# Altium PCB LCD_PCC.PcbDoc
Units mil, origin at the board's own origin, x right, y up, seen from the top; angles counter-clockwise.
Board outline 10841.54 x 4658.74 mil, 2 copper layers (Top Layer, Bottom Layer); 82 components, 79 nets, 292 pads, 8 vias.
Unrouted connection lines stored in the file: 34.
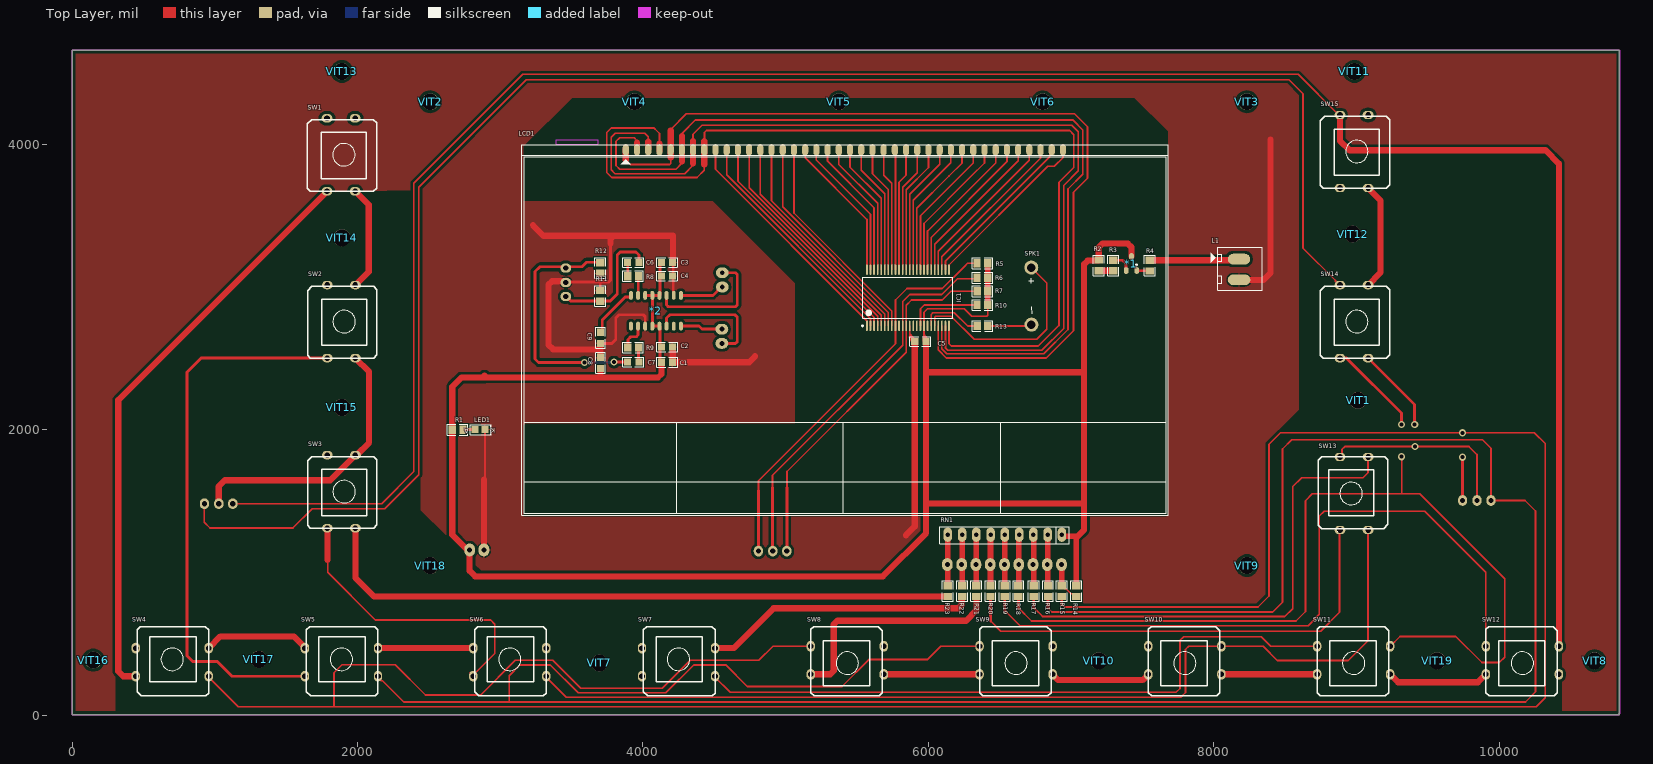
[diagram p0: Top Layer view]
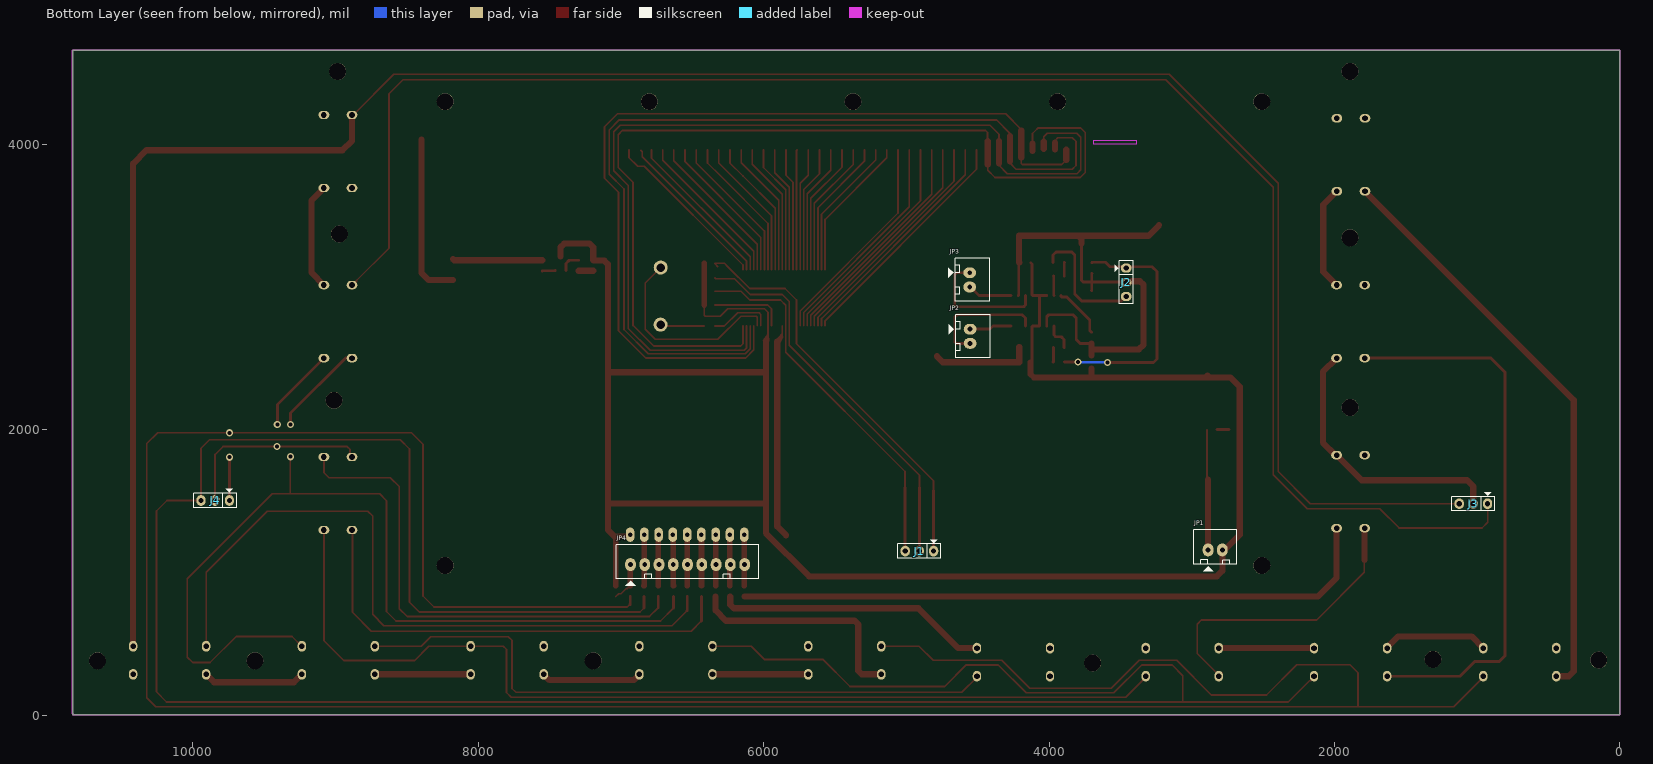
[diagram p1: Bottom Layer view, seen from below]
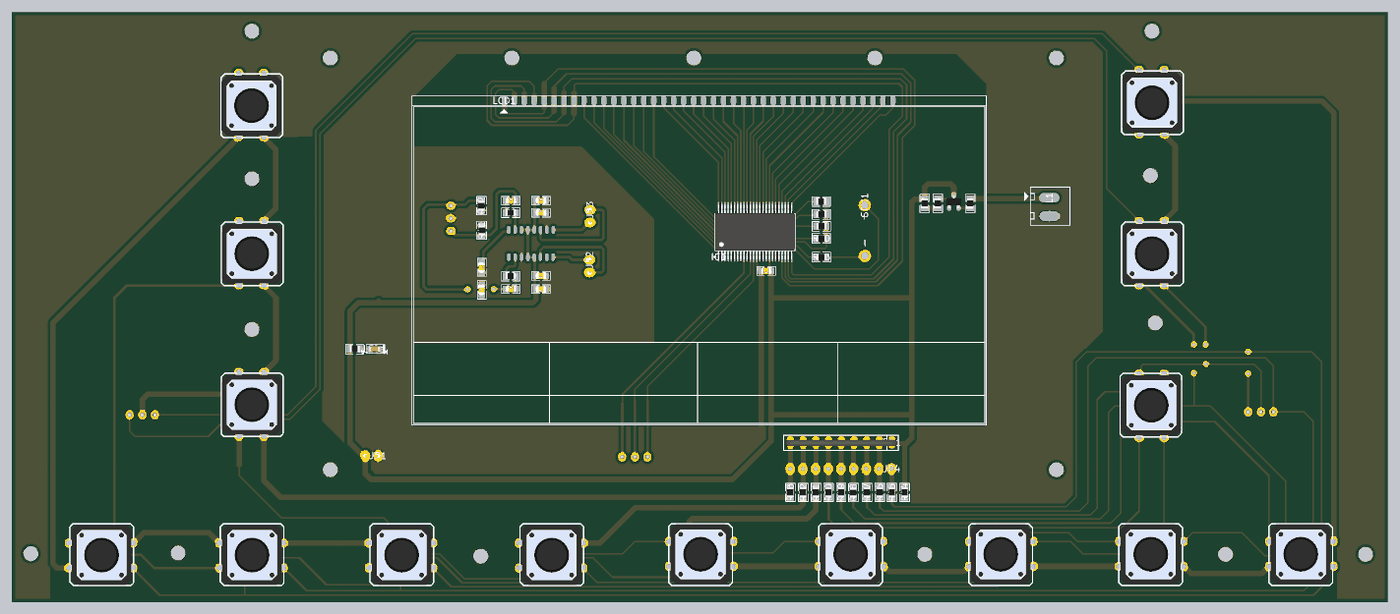
[diagram p2: 3D render of the assembled board from above, using the file's embedded part models]
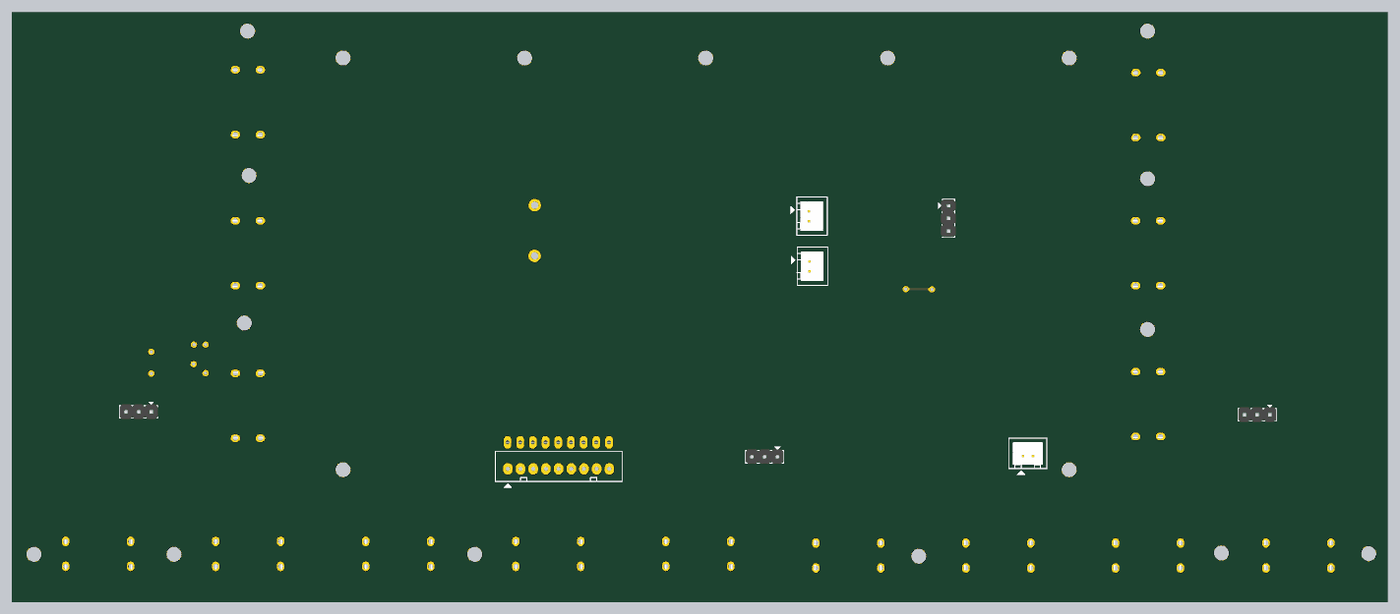
[diagram p3: 3D render of the assembled board from below, using the file's embedded part models]

## Layer stack, top to bottom
Top Solder: solder mask 0.4, Solder Resist, Dk 3.5
Top Layer: signal copper 1.4
Dielectric 1: dielectric 12.6, FR-4, Dk 4.8
Bottom Layer: signal copper 1.4
Bottom Solder: solder mask 0.4, Solder Resist, Dk 3.5

## Board outline
0.2,0.71 10841.73,0.71 10841.74,4659.45 0.2,4659.45

## Design rules (kind name [scope] priority, off if disabled: settings)
Clearance [All] p1: gap=20
PolygonConnect [All] p1: connectstyle=Relief reliefconductorwidth=10 reliefentries=4 polygonreliefangle="90 Angle" airgapwidth=10
RoutingVias [All] p1: holewidth=28 width=50 viastyle="Through Hole" minholewidth=28 minwidth=50 maxholewidth=28 maxwidth=50
SolderMaskExpansion [All] p1: expansion=4
Width [All] p1: maxlimit=43.31 minlimit=11.81 preferedwidth=20
30 further rules are at their usual default settings.

## Components (designator, comment, footprint, x,y, rotation, side; value= is the part's Value field where it differs from the comment)
*1 "DV3" SOT23B 7423.62,3163.78 r0 top
*2 "PAM8403" PAM8403 4091.14,2833 r270 top
C1 "1uF" CAP_0805 4169.29,2472.44 r180 top
C2 "0.1uF" CAP_0805 4169.29,2578.35 r180 top
C3 "0.1uF" CAP_0805 4169.29,3170.47 r0 top
C4 "1uF" CAP_0805 4169.29,3075.98 r0 top
C5 "104" CAP_0805 5944.69,2616.93 r180 top
C6 "0.1uF" CAP_0805 3932.68,3170.47 r0 top
C7 "0.1uF" CAP_0805 3932.68,2473.23 r0 top
C8 "0.1uF" CAP_0805 3703.15,2467.32 r90 top
C9 "0.1uF" CAP_0805 3703.15,2642.92 r270 top
IC1 "HT1621B" HT1621 5569.69,2726.77 r180 top
J1 "Jumper 3" JP3 4909.18,1148.78 r0 bottom
J2 "Jumper 3" JP3 3459.84,3031.69 r270 bottom
J3 "Jumper 3" JP3 1027.35,1480.71 r0 bottom
J4 "Jumper 3" JP3 9843.49,1503.54 r0 bottom
JP1 "JP2" CON2 2885.87,1156.91 r180 bottom
JP2 "JP2" CON2 4553.15,2703.94 r270 bottom
JP3 "JP2" CON2 4556.3,3099.21 r270 bottom
JP4 "JP9" CON9 6933.46,1054.33 r180 bottom
L1 "Led_LCD" Led_LCD 8176.93,3191.93 r270 top
LCD1 "LCD_40pin" LCD_40P 3880.38,3960.63 r0 top
LED1 "RED LED" LED_0805 2859.23,2000.14 r180 top
R1 "1K" RES_0805 2701.5,2000.14 r0 top
R2 "10K" RES_0805 7194.09,3150.79 r270 top
R3 "1K" RES_0805 7296.46,3149.84 r270 top
R4 "10R" RES_0805 7551.97,3149.21 r90 top
R5 "10K" RES_0805 6378.16,3165.19 r0 top
R6 "10K" RES_0805 6378.74,3062.99 r0 top
R7 "10K" RES_0805 6379.16,2968.79 r0 top
R8 "10K" RES_0805 3931.31,3075.98 r180 top
R9 "10K" RES_0805 3931.31,2575.59 r180 top
R10 "433" RES_0805 6378.74,2873.23 r0 top
R11 "100" RES_0805 3701.97,2937.4 r90 top
R12 "100" RES_0805 3700.39,3132.28 r90 top
R13 "1K" RES_0805 6379.92,2725.98 r180 top
R14 "10K" RES_0805 7036.22,868.5 r270 top
R15 "1K" RES_0805 6935.04,868.5 r270 top
R16 "1K" RES_0805 6838.98,868.5 r270 top
R17 "1K" RES_0805 6738.58,868.5 r270 top
R18 "1K" RES_0805 6631.5,867.72 r270 top
R19 "1K" RES_0805 6535.83,868.5 r270 top
R20 "1K" RES_0805 6435.43,868.5 r270 top
R21 "1K" RES_0805 6336.61,868.5 r270 top
R22 "1K" RES_0805 6236.61,868.5 r270 top
R23 "1K" RES_0805 6135.43,868.5 r270 top
RN1 "10K" RN8 6936.22,1263.78 r180 top
SPK1 "Speaker" SPK1 6721.38,3135.55 r270 top
SW1 "SW" SW4_1012 1885.04,3925.98 r90 top
SW2 "SW" SW4_1012 1887.3,2757.08 r90 top
SW3 "SW" SW4_1012 1887.3,1565.34 r90 top
SW4 "SW" SW4_1012 701.9,370.64 r180 top
SW5 "SW" SW4_1012 1887.71,370.64 r180 top
SW6 "SW" SW4_1012 3067.06,370.64 r180 top
SW7 "SW" SW4_1012 4249.64,370.64 r180 top
SW8 "SW" SW4_1012 5432.22,383.63 r0 top
SW9 "SW" SW4_1012 6614.8,383.63 r0 top
SW10 "SW" SW4_1012 7797.38,383.63 r0 top
SW11 "SW" SW4_1012 8979.96,383.63 r0 top
SW12 "SW" SW4_1012 10162.53,383.63 r0 top
SW13 "SW" SW4_1012 8982.78,1552.35 r270 top
SW14 "SW" SW4_1012 8982.78,2757.08 r90 top
SW15 "SW" SW4_1012 8982.78,3948.82 r90 top
VIT1 "1" VIT 9010.76,2205.41 r0 top
VIT2 "1" VIT 2509.17,4297.45 r0 top
VIT3 "1" VIT 8232.13,4297.45 r0 top
VIT4 "1" VIT 3939.91,4297.45 r0 top
VIT5 "1" VIT 5374.05,4297.45 r0 top
VIT6 "1" VIT 6801.39,4297.45 r0 top
VIT7 "1" VIT 3694.89,364.81 r0 top
VIT8 "1" VIT 10668.46,379.88 r0 top
VIT9 "1" VIT 8232.13,1047.58 r0 top
VIT10 "1" VIT 7194.64,379.88 r0 top
VIT11 "1" VIT 8985.21,4509.53 r0 top
VIT12 "1" VIT 8973.39,3370.16 r0 top
VIT13 "1" VIT 1891.22,4509.53 r0 top
VIT14 "1" VIT 1891.22,3343.84 r0 top
VIT15 "1" VIT 1891.22,2155.14 r0 top
VIT16 "1" VIT 148.79,385.13 r0 top
VIT17 "1" VIT 1309.58,390.26 r0 top
VIT18 "1" VIT 2509.17,1047.58 r0 top
VIT19 "1" VIT 9564.75,379.88 r0 top (schematic designator VIT8)

## Footprints (in the part's own frame and the unit in brackets; to place one, negate y for a bottom-side part, rotate by r counter-clockwise, add the part's x,y. Pads: shape width x height; smd on the part's side, far side on the other; paste and mask are expansions set on the pad)
CAP_0805 [mil]
  rect 50x50 smd mask+3: 1(-39.37,0) 2(39.37,0)
  silkscreen extent -73,-34 73,34, body extent -39,-25 39,25, height 31
CON2 [mil]
  oval 75x90 hole 34: 1(0,0) 2(100,0)
  silkscreen extent -100,-150 200,140, body extent -68,-70 168,107, height 236
CON9 [mil] "CON9"
  oval 75x90 hole 34: 1(0,0) 2(100,0) 3(200,0) 4(300,0) 5(400,0) 6(500,0) 7(600,0) 8(700,0) 9(800,0)
  silkscreen extent -100,-150 900,140
HT1621 [mm]
  oval 0.3x1.85 smd: 1(0,0) 2(-0.635,0) 3(-1.27,0) 4(-1.905,0) 5(-2.54,0) 6(-3.175,0) 7(-3.81,0) 8(-4.445,0) 9(-5.08,0) 10(-5.715,0) 11(-6.35,0) 12(-6.985,0) 13(-7.62,0) 14(-8.255,0) 15(-8.89,0) 16(-9.525,0) 17(-10.16,0) 18(-10.795,0) 19(-11.43,0) 20(-12.065,0) 21(-12.7,0) 22(-13.335,0) 23(-13.97,0) 24(-14.605,0) 25(-14.605,-10) 26(-13.97,-10) 27(-13.335,-10) 28(-12.7,-10) 29(-12.065,-10) 30(-11.43,-10) 31(-10.795,-10) 32(-10.16,-10) 33(-9.525,-10) 34(-8.89,-10) 35(-8.255,-10) 36(-7.62,-10) 37(-6.985,-10) 38(-6.35,-10) 39(-5.715,-10) 40(-5.08,-10) 41(-4.445,-10) 42(-3.81,-10) 43(-3.175,-10) 44(-2.54,-10) 45(-1.905,-10) 46(-1.27,-10) 47(-0.635,-10) 48(0,-10)
  silkscreen extent -15.3,-8.67 0.9,0.12, body extent -15.3,-10.5 0.7,0.5, height 1.8
JP3 [mil] "Jumper 3"
  oval 65x75 hole 36: 1(-100,0) 2(1,0) 3(99,0)
  silkscreen extent -150,-81 150,50, body extent -150,-60 150,55, height 355
LCD_40P [mm]
  oval 1.1x2 smd: 1(0,0) 2(1.995,0) 3(3.99,0) 4(5.985,0) 5(7.979,0) 6(9.974,0) 7(11.969,0) 8(13.964,0) 9(15.959,0) 10(17.954,0) 11(19.949,0) 12(21.944,0) 13(23.938,0) 14(25.933,0) 15(27.928,0) 16(29.923,0) 17(31.918,0) 18(33.913,0) 19(35.908,0) 20(37.903,0) 21(39.897,0) 22(41.892,0) 23(43.887,0) 24(45.882,0) 25(47.877,0) 26(49.872,0) 27(51.867,0) 28(53.861,0) 29(55.856,0) 30(57.851,0) 31(59.846,0) 32(61.841,0) 33(63.836,0) 34(65.831,0) 35(67.826,0) 36(69.82,0) 37(71.815,0) 38(73.81,0) 39(75.805,0) 40(77.8,0)
  Keep-Out Layer region: -12.436,0.983 -4.944,0.983 -4.944,1.669 -12.436,1.669
  silkscreen extent -18.49,-65.07 96.51,0.93
LED_0805 [mm] "LED"
  rect 1.2x1.2 smd mask+0.076: A(0.889,0) K(-0.889,0)
  silkscreen extent -1.99,-0.89 1.73,0.89, body extent -1.01,-0.62 1.01,0.63, height 1.1
Led_LCD [mm]
  oval 1.905x4 smd: 1(-0.074,0) 2(3.625,0.016)
  silkscreen extent -2.18,-5.06 5.44,4.1
PAM8403 [mil]
  oval 62.01x27.56 smd: 1(-107.8,175) 2(-107.8,125) 3(-107.8,75) 4(-107.8,25) 5(-107.8,-25) 6(-107.8,-75) 7(-107.8,-125) 8(-107.8,-175) 9(107.8,-175) 10(107.8,-125) 11(107.8,-75) 12(107.8,-25) 13(107.8,25) 14(107.8,75) 15(107.8,125) 16(107.8,175)
RES_0805 [mm]
  rect 1.3x1.5 smd mask+0.076: 1(0.95,0) 2(-0.95,0)
  silkscreen extent -1.83,-0.97 1.83,0.97, body extent -1,-0.63 1,0.62, height 0.5
RN8 [mil] "R SIP8, 9 Pin"
  oval 60x100 hole 32: 1(0,0) 2(100,0) 3(200,0) 4(300,0) 5(400,0) 6(500,0) 7(600,0) 8(700,0) 9(800,0)
  silkscreen extent -50,-55 855,65, body extent -43,-20 843,29, height 219
SOT23B [mm]
  oval 0.85x1.2 smd: 1(0.94,-1.245) 2(0,1.25) 3(-0.95,-1.25)
  silkscreen extent 0.77,-0.38 1.02,-0.13, body extent -1.5,-1.3 1.5,1.2, height 1.06
SPK1 [mm]
  round 2.5 hole 1.5: 1(0,0) 2(10.163,0.027)
  silkscreen extent 1.92,-0.46 8.2,0.43
SW4_1012 [mm]
  oval 1.5x1.905 hole 1: 1(-6.5,2.5) 2(6.5,-2.5) 3(6.5,2.5) 4(-6.5,-2.5)
  silkscreen extent -6.5,-6.33 6.75,6, body extent -6.84,-6.08 6.61,5.92, height 14.7
VIT [mm] "VIT"
  round 3 hole 3: VIT1(0,0)

## Part data
C1 C4: library part CAP_1uF-50V-5%-0805, "1µF ±5% 50V Ceramic Capacitor X7R 0805 (2012 Metric)"
C2 C3 C5 C6 C7 C8 C9: library part CAP_0.1uF-50V-5%-0805, "0.1µF ±5% 50V Ceramic Capacitor X7R 0805 (2012 Metric)"
IC1: "5V - 256kHz - 1/4 Duty - 32X4 LCD - 3 Wire INTERFACE"
J1 J2 J3 J4: library part JP3
JP1 JP2 JP3: library part Con2, "Connector 2"
JP4: library part Con9, "Connector 9"
L1: "Led LCD 5V"
LCD1: "LCD_40Pin"
LED1: library part LED-RED_10mA-0805, "Red 621nm LED Indication - Discrete 2V 0805 (2012 Metric)"
R1 R3 R13 R15 R16 R17 R18 R19 R20 R21 R22 R23: library part RES_1K-0.125W-1%-0805, "1 kOhms ±1% 0.125W, 1/8W Chip Resistor 0805 (2012 Metric) Moisture Resistant Thick Film"
R2 R5 R6 R7 R8 R9 R14: library part RES_10K-0.125W-1%-0805, "10 kOhms ±1% 0.125W, 1/8W Chip Resistor 0805 (2012 Metric) Moisture Resistant Thick Film"
R4: library part RES_1K-0.125W-1%-0805
R10: library part RES_10K-0.125W-1%-0805, "433 Ohms ±1% 0.125W, 1/8W Chip Resistor 0805 (2012 Metric) Moisture Resistant Thick Film"
R11 R12: library part RES_0ohm-0.125W-1%-0805_1, "0Ohms ±1% 0.125W, 1/8W Chip Resistor 0805 (2012 Metric) Moisture Resistant Thick Film"
RN1: library part RN8, "Resistor 8 (Thanh)"
SPK1: library part SPK1, "Speaker Chip"
SW1 SW2 SW3 SW4 SW5 SW6 SW7 SW8 SW9 SW10 SW11 SW12 SW13 SW14 SW15: library part SW4, "Switch button 4 pin"
VIT1 VIT2 VIT3 VIT4 VIT5 VIT6 VIT7 VIT8 VIT9 VIT10 VIT11 VIT12 VIT13 VIT14 VIT15 VIT16 VIT17 VIT18 VIT19: library part VIT, "Oc Vit"

## Via types
v1: diameter 50, hole 28, Top Layer to Bottom Layer, 8 vias

## Nets (pads, with @x,y where several pads share a name; then routed paths per layer and width w, separated by ;. In a path a pad name is that pad's centre, name@x,y a point inside that pad or via, vN(x,y) a via of type N, cw(c..) or ccw(c..) an arc to the next point about the centre after c; other vN are vias at no path point)
COL1: J4.1 R15.1 SW1.1 SW1.3 SW4.1 SW4.3 SW8.1 SW8.3 | length 24276.9
  Top Layer w11.81: SW4.1 957.81,264.24 1164.27,57.78 1835.54,57.78 ; SW8.1 4911.66,482.06 4812.45,382.84 4592.94,382.84 4592.66,383.12 4331.09,383.12 4135.29,187.32 3564.91,187.32 3369.39,382.84 3105.4,382.84 2863.46,140.91 2476.71,140.91 2265.85,351.76 1891.47,351.76 1835.54,295.84 1835.54,57.78 ; 6938.58,773.31 6954.95,756.94 8309.73,756.94 8387.08,834.3 8387.08,1897.56 8467.46,1977.94 v1(9743.49,1977.94) 10246.44,1977.94 10321.88,1902.51 10321.88,120.15 10259.33,57.59 1835.73,57.59 1835.54,57.78
  Top Layer w20: R15.1 6935.04,776.85 6938.58,773.31 ; J4.1 v1(9743.49,1806.78)
  Top Layer w43.31: SW4.3 358.22,272.22 323.84,306.59 323.84,2207.31 SW1.1
COL2: J4.3 R16.1 SW2.1 SW2.3 SW5.1 SW5.3 SW9.1 SW9.3 | length 22299.6
  Top Layer w11.81: SW5.1 2143.62,264.24 2167.24,240.62 2175.21,240.62 2323.94,91.89 3063.41,91.89 ; SW9.1 6087.27,482.06 5995.05,389.83 5585.39,389.83 5395.26,199.7 4731.1,199.7 4579.48,351.31 4579.2,351.03 4356.54,351.03 4161.02,155.51 3547.38,155.51 3351.86,351.03 3138.04,351.03 3063.41,276.41 3063.41,91.89 ; 6838.98,750.25 6866.77,722.46 8412.39,722.46 8481.29,791.36 8481.29,1863.61 8547.19,1929.5 9882.72,1929.5 9942.49,1869.74 J4.3 10180.6,1503.54 10254.62,1429.53 10254.62,162.57 10183.93,91.89 3063.41,91.89 ; SW9.3@6870.7,474.09 SW9.3
  Top Layer w20: SW5.3 1121.03,272.22 1017.15,376.1 846.09,376.1 806.63,415.57 806.63,2402.47 905.34,2501.18 SW2.1 ; 6838.98,750.25 R16.1
COL3: R17.1 SW3.1 SW3.3 SW6.1 SW6.3 SW10.1 SW10.3 SW13.1 SW13.3 | length 12585.6
  Top Layer w11.81: 1790.91,1087.25 1790.91,999.7 2125.19,665.42 2933.69,665.42 2962.65,636.45 2962.65,431.69 2811.16,280.19 SW6.3 ; SW6.3@2787.53,295.84 SW6.3@2807.17,276.2 ; SW6.1 3322.97,264.24 3463.51,123.7 7767.95,123.7 7802.34,158.09 7802.34,459.49 7824.92,482.06 SW10.3 8346.05,482.06 8445.74,382.37 8941.91,382.37 9081.2,521.66 SW13.3 ; 6738.59,752.68 6800.62,690.65 8498,690.65 8552.93,745.58 8552.93,1600.94 8615.73,1663.74 9046.19,1663.74 9081.2,1698.75 SW13.1
  Top Layer w20: 6738.59,752.68 R17.1
  Top Layer w43.31: SW3.1 1790.91,1307.41 1790.91,1087.25
COL4: J3.1 R18.1 SW7.1 SW7.3 SW11.1 SW11.3 SW14.1 SW14.3 | length 23478.1
  Top Layer w11.81: J3.1 927.35,1350.07 967.06,1310.35 1547.61,1310.35 1681.96,1444.7 2190.44,1444.7 2429.53,1683.8 2429.53,3698.64 3182.56,4451.66 8527.63,4451.66 8625.59,4353.7 8625.59,3271.74 8852.76,3044.58 8852.76,3036.61 8876.38,3012.99 SW14.3 ; SW7.1 4505.55,264.24 4610.98,158.81 7735.76,158.81 7763.44,186.49 7763.44,524.24 7788.73,549.54 8332.78,549.54 8400.26,482.06 SW11.1 ; 6633.46,747.94 6722.64,658.77 8576.5,658.77 8642.85,725.12 8642.85,1501.87 8691.13,1550.15 9316.44,1550.15 ; SW11.3 9304.6,550.79 9696.24,550.79 9879.2,367.83 10001.51,367.83 10039.19,405.51 10039.19,955.07 9444.1,1550.15 9316.44,1550.15 ; v1(9316.44,1809.92) 9316.44,1550.15
  Top Layer w20: R18.1 6631.5,749.91 6633.46,747.94 ; SW14.1 8928.85,2501.18 9314.64,2115.39 9314.64,2036.71 v1(9316.44,2034.91)
COL5: J3.3 R19.1 SW12.1 SW12.3 SW15.1 SW15.3 | length 20413
  Top Layer w11.81: J3.3 2169.62,1480.71 2394.92,1706.01 2394.92,3726.43 3158.59,4490.1 8591.01,4490.1 8876.38,4204.72 SW15.3 ; 6536.22,732.83 6642.89,626.16 8661.06,626.16 8740.08,705.17 8740.08,1394.32 8773.62,1427.86 9479.19,1427.86 9906.63,1000.43 SW12.1
  Top Layer w20: R19.1 6535.83,733.22 6536.22,732.83
  Top Layer w43.31: SW15.3 8884.35,4024.46 8951.58,3957.22 10324.84,3957.22 10418.44,3863.62 SW12.3
COM0: IC1.21 LCD1.1 LCD1.5 | length 6322.7
  Top Layer w11.81: 3880.27,3889.09 3911.44,3857.93 4187.61,3857.93 4194.53,3864.85 4194.53,3906.69 ; 4194.53,4102.4 4304.34,4212.22 7024.4,4212.22 7114.9,4121.71 7114.9,3761.42 7016.78,3663.29 7016.78,2693.36 6825.39,2501.97 6126.43,2501.97 6069.69,2558.71 IC1.21
  Top Layer w43.31: 3880.27,3889.09 3880.27,3930.13 3880.38,3930.23 LCD1.1 ; 4194.53,3906.69 LCD1.5 4194.53,4095.67
COM1: IC1.22 LCD1.2 LCD1.6 | length 6562.5
  Top Layer w11.81: LCD1.2 3958.91,4026.12 3938.98,4046.06 3836.61,4046.06 3811.42,4020.87 3811.42,3851.01 3837.65,3824.78 4231.87,3824.78 4273.07,3865.98 ; 4276.09,4077.66 4368.5,4170.08 7011.42,4170.08 7082.45,4099.05 7082.45,3790.5 6978.31,3686.37 6978.31,2701.38 6808.43,2531.5 6129.16,2531.5 6094.69,2565.97 IC1.22
  Top Layer w43.31: LCD1.2@3959.04,3962.89 3959.04,4012.1 ; 4273.07,4057.25 LCD1.6 4273.07,3879.16 4273.17,3879.06
COM2: IC1.23 LCD1.3 LCD1.7 | length 6679.9
  Top Layer w11.81: LCD1.3 4037.45,4051.13 4011.81,4076.77 3805.51,4076.77 3778.51,4049.77 3778.51,3819.91 3804.72,3793.7 4293.7,3793.7 4351.61,3851.61 ; 4351.61,4022.56 4351.61,4069.32 4414.17,4131.89 7005.91,4131.89 7051.37,4086.43 7051.37,3814.13 6947.84,3710.59 6947.84,2708.92 6794.82,2555.91 6137.01,2555.91 6119.69,2573.23 IC1.23
  Top Layer w43.31: LCD1.3@4037.59,3967.72 4037.59,4016.93 ; 4351.61,3864.85 LCD1.7 4351.61,4022.56
COM3: IC1.24 LCD1.4 LCD1.8 | length 6846.9
  Top Layer w11.81: LCD1.4 LCD1.4@4115.99,3967.72 ; 4115.99,4046.06 LCD1.4@4115.99,3967.72 ; 4430.14,3857.32 4430.14,3817.15 4379.53,3766.54 3782.68,3766.54 3747.24,3801.97 3747.24,4081.72 3778.51,4112.99 4077.95,4112.99 4084.62,4106.32 4115.99,4074.95 LCD1.4@4115.99,3967.72 ; 4432.11,4022.56 4432.11,4081.72 4446.06,4095.67 6990.16,4095.67 7019.31,4066.51 7019.31,3836.68 6915.36,3732.72 6915.36,2730.13 6771.05,2585.83 6160.5,2585.83 6144.69,2601.64 IC1.24
  Top Layer w43.31: LCD1.4@4116.4,3953.91 4116.4,4003.12 ; 4430.14,3857.32 LCD1.8 4430.14,4020.59
CS: IC1.9 J1.1 R5.2 | length 2866.2
  Top Layer w11.81: 4810.43,1573.67 4810.43,1642.01 5769.69,2601.27 IC1.9 5769.69,2908.49 5850.17,2988.98 6098.24,2988.98 6250.83,3141.57 6274.45,3165.19 R5.2 6340.76,3161.25 R5.2@6321.07,3141.57
  Top Layer w20: J1.1@4810.43,1148.78 4810.43,1573.67
DATA: IC1.12 J1.3 R7.2 | length 2605.6
  Top Layer w11.81: 5009.43,1595.55 5009.43,1706.27 5844.69,2541.53 IC1.12 5844.69,2870.77 5882.41,2908.49 6098.1,2908.49 6158.4,2968.79 R7.2
  Top Layer w20: J1.3@5009.43,1148.78 5009.43,1595.55
GND: *2.2 *2.11 C1.1 C2.1 C3.2 C4.2 C5.2 C8.2 C9.2 IC1.13 J2.2 JP1.1 L1.2 LED1.K R11.1 R12.2 | length 7995.8
  Top Layer w11.81: 2885.87,1649.36 2894.23,1657.73 LED1.K ; IC1.13 5869.69,2652.55 C5.2@5886.22,2636.02
  Top Layer w15: C3.2 C3.2@4212.4,3166.73
  Top Layer w20: J2.2@3453.94,3039.94 3459.04,3034.85 3701.18,3034.85 ; R12.2 3701.18,3094.1 3701.18,3034.85 ; R11.1 3701.18,2975.59 3701.18,3034.85 ; C9.2 3782.05,2603.54 3809.28,2630.77 3809.28,2781.98 3832.42,2805.12 4002.02,2805.12 4016.14,2790.99 *2.11 ; 3771.92,3304.39 3771.92,3046.56 3760.21,3034.85 3701.18,3034.85 ; C3.2@4212.4,3166.73 4212.4,2944.54 *2.2 ; C8.2 3703.15,2520.28 C8.2
  Top Layer w43.31: JP1.1 2885.87,1649.36 ; 3229.11,3432.78 3303.13,3358.76 3797.29,3358.76 ; J2.2@3453.94,3039.94 3363.42,3039.94 3338.05,3014.58 3338.05,2595.11 3371.25,2561.91 3703.15,2561.91 ; C8.2@3703.15,2520.28 3703.15,2561.91 ; C9.2@3703.15,2603.54 3703.15,2561.91 ; 3771.92,3304.39 3771.92,3333.4 3797.29,3358.76 ; C2.1 C1.1 4744.65,2472.44 4786.04,2513.83 ; C3.2 4210.4,3172.21 4210.4,3358.76 3797.29,3358.76 ; 5843.45,1259.8 5905.31,1321.66 C5.2 ; L1.2 8349.33,3049.21 8397.05,3096.93 8397.05,4032.03
Left: C6.2 J2.3 R11.2 | length 900.5
  Top Layer w20: J2.3@3453.94,2941.94 3495.88,2900 R11.2 3769.31,2900 3820.05,2950.74 3820.05,3224.34 3840.95,3245.24 3949.79,3245.24 3972.05,3222.98 C6.2
Net*1_1: *1.1 R4.2 | length 92.6
  Top Layer w20: *1.1 7462.11,3113.3 7550.48,3113.3 R4.2
Net*1_3: *1.3 R3.2 | length 148.3
  Top Layer w20: R3.2 7362.02,3187.23 7386.22,3163.03 *1.3
Net*2_1: *2.1 JP3.2 | length 314.4
  Top Layer w15: JP3.2@4548.8,2999.21 JP3.2
  Top Layer w20: *2.1 4490.38,2940.8 JP3.2@4548.8,2999.21
Net*2_3: *2.3 JP3.1 | length 897
  Top Layer w20: *2.3 4166.14,2872.74 4177.86,2861.02 4649.31,2861.02 4661.02,2872.74 4661.02,3087.5 4649.31,3099.21 JP3.1
Net*2_7: *2.7 R8.2 | length 136.2
  Top Layer w20: *2.7 3967.43,2942.08 3967.43,3074.7 R8.2
Net*2_8: *2.8 C9.1 | length 368
  Top Layer w20: C9.1 3715.21,2694.35 3715.21,2767.9 3876.05,2928.74 3912.36,2928.74 3916.14,2932.52 *2.8
Net*2_10: *2.10 R9.1 | length 202.9
  Top Layer w20: R9.1 3895.67,2577.35 3895.67,2631.5 3914.57,2650.39 3954.43,2650.39 3966.14,2662.11 *2.10
Net*2_14: *2.14 JP2.2 | length 853.1
  Top Layer w20: *2.14 4166.14,2781.5 4189.76,2805.12 4643.87,2805.12 4661.02,2787.96 4661.02,2615.65 4649.31,2603.94 JP2.2
Net*2_16: *2.16 JP2.1 | length 295.8
  Top Layer w20: *2.16 4392.52,2725.2 4413.78,2703.94 JP2.1
NetC6_1: C6.1 R8.1 | length 94.7
  Top Layer w20: C6.1 3893.61,3170.17 3893.61,3076.28 R8.1
NetC7_2: C7.2 R9.2 | length 103.7
  Top Layer w20: R9.2 3970.38,2573.92 3970.38,2474.9 C7.2
NetIC1_16: IC1.16 R10.2 | length 527.3
  Top Layer w11.81: IC1.16 5944.69,2846.26 5971.66,2873.23 R10.2
NetIC1_19: IC1.19 R13.1 | length 446.3
  Top Layer w11.81: IC1.19 6019.69,2806.69 6031.89,2818.9 6182.33,2818.9 6275.24,2725.98 R13.1
NetIC1_20: IC1.20 SPK1.1 | length 1423.7
  Top Layer w11.81: IC1.20 6044.69,2788.31 6051.6,2795.22 6158.71,2795.22 6321.26,2632.68 6759.84,2632.68 6829.92,2702.76 6829.92,3027.01 SPK1.1
NetJP4_1: JP4.1 R14.1 R15.2 | length 281.2
  Top Layer w11.81: R15.2 6954.73,886.22 6963.78,886.22 6999.22,850.78 7016.54,850.78 R14.1
  Top Layer w39.37: JP4.1 6934.25,1053.54 6934.25,906.69 R15.2
NetJP4_2: JP4.2 R16.2 RN1.2 | length 359
  Top Layer w39.37: RN1.2 6837.6,1262.4 6837.6,907.28 R16.2
NetJP4_3: JP4.3 R17.2 RN1.3 | length 358.9
  Top Layer w39.37: RN1.3 6737.4,1262.6 6737.4,907.08 R17.2
NetJP4_4: JP4.4 R18.2 RN1.4 | length 360.6
  Top Layer w39.37: R18.2 6633.86,907.48 6633.86,1261.42 RN1.4
NetJP4_5: JP4.5 R19.2 RN1.5 | length 358
  Top Layer w39.37: R19.2 6536.03,906.1 6536.03,1263.58 RN1.5
NetJP4_6: JP4.6 R20.2 RN1.6 | length 358.2
  Top Layer w39.37: R20.2 6435.83,906.29 6435.83,1263.39 RN1.6
NetJP4_7: JP4.7 R21.2 RN1.7 | length 358
  Top Layer w39.37: RN1.7 6336.42,1263.58 6336.42,906.1 R21.2
NetJP4_8: JP4.8 R22.2 RN1.8 | length 358
  Top Layer w39.37: RN1.8 6236.42,1263.58 6236.42,906.1 R22.2
NetJP4_9: JP4.9 R23.2 RN1.9 | length 358.2
  Top Layer w39.37: R23.2 6135.83,906.29 6135.83,1263.39 RN1.9
NetL1_1: L1.1 R4.1 | length 628.4
  Top Layer w43.31: R4.1 8168.7,3186.61 L1.1
NetLED1_A: LED1.A R1.1 | length 85.3
  Top Layer w20: R1.1 LED1.A
NetR2_1: R2.1 R3.1 | length 102.8
  Top Layer w43.31: R2.1 7194.57,3112.91 7295.98,3112.91 R3.1
NetR13_2: R13.2 SPK1.2 | length 309
  Top Layer w11.81: R13.2 6712.99,2725.98 SPK1.2
Right: C7.1 J2.1 R12.1 | length 1756.4
  Top Layer w20: v1(3591.26,2471.11) 3268.99,2471.11 3244.27,2495.83 3244.27,3107.35 3277.86,3140.94 3453.94,3140.94 3572.5,3140.94 3604.47,3172.92 3694.09,3172.92 3697.16,3172.92 R12.1 ; v1(3798,2473.33) 3798.05,2473.28 C7.1 C7.1
  Bottom Layer w20: v1(3591.26,2471.11) 3592.37,2472.22 3796.89,2472.22 v1(3798,2473.33)
ROW1: J3.2 R23.1 SW1.2 SW1.4 SW2.2 SW2.4 SW3.2 SW3.4 | length 7220.2
  Top Layer w43.31: J3.2 1028.35,1602.22 1070.71,1644.59 1809.07,1644.59 SW3.2 1993.23,1821.25 2081.18,1909.2 2081.18,2405.72 SW2.4 ; SW1.4 2078.51,3575.04 2078.51,3105.76 SW2.2 ; SW3.4 1985.73,960.38 2115.01,831.1 R23.1
ROW2: R22.1 SW4.2 SW4.4 SW5.2 SW5.4 SW6.2 SW6.4 SW7.2 SW7.4 | length 3325.2
  Top Layer w43.31: SW4.4 1039.36,550.61 1554.88,550.61 1631.8,473.69 SW5.2 ; SW5.4 SW6.2 ; SW7.4 4637.12,469.07 4916,747.94 6208.66,747.94 6234.03,773.31 6234.03,828.51 R22.1
ROW3: R21.1 SW8.2 SW8.4 SW9.2 SW9.4 SW10.2 SW10.4 SW11.2 SW11.4 SW12.2 SW12.4 | length 4396.4
  Top Layer w43.31: SW8.4 5312.41,285.21 5337.78,310.58 5337.78,635.34 5363.15,660.71 6264.5,660.71 6336.61,732.83 R21.1 ; SW8.2 SW9.4 ; SW9.2 6910.65,245.27 7501.53,245.27 SW10.4 ; SW10.2 SW11.4 ; SW11.2 9291.46,229.61 9851.03,229.61 SW12.4
ROW4: J4.2 R20.1 SW13.2 SW13.4 SW14.2 SW14.4 SW15.2 SW15.4 | length 5992.1
  Top Layer w11.81: 6435.44,659.55 6507.26,587.72 8750.01,587.72 8881.58,719.3 8881.58,1293.68 SW13.2 ; SW13.4 8898.08,1821.98 8898.08,1861.69 8917.48,1881.1 9788.4,1881.1 9844.49,1825.01 J4.2
  Top Layer w20: 6435.44,659.55 R20.1 ; SW14.4 9406.62,2175.76 9406.62,2036.32 v1(9408.03,2034.91)
  Top Layer w43.31: SW14.2 9168.09,3099.87 9168.09,3606.03 SW15.4
  other v1: 9410.56,1881.1
SEG0: IC1.8 LCD1.16 | length 1518.1
  Top Layer w11.81: LCD1.16 5058.45,3517.65 5744.69,2831.41 IC1.8
SEG1: IC1.7 LCD1.15 | length 1540.3
  Top Layer w11.81: LCD1.15 4979.91,3560.64 5719.69,2820.87 IC1.7
SEG2: IC1.6 LCD1.14 | length 1562.5
  Top Layer w11.81: LCD1.14 4901.37,3603.06 5694.69,2809.74 IC1.6
SEG3: IC1.5 LCD1.13 | length 1584.6
  Top Layer w11.81: LCD1.13 4822.83,3649.33 5669.69,2802.48 IC1.5
SEG4: IC1.4 LCD1.12 | length 1606.8
  Top Layer w11.81: LCD1.12 4744.3,3695.61 5512.08,2927.83 5644.69,2795.22 IC1.4
SEG5: IC1.3 LCD1.11 | length 1629
  Top Layer w11.81: LCD1.11 4665.76,3741.89 5619.69,2787.96 IC1.3
SEG6: IC1.2 LCD1.10 | length 1651.2
  Top Layer w11.81: LCD1.10 4587.22,3785.47 5594.69,2778 IC1.2
SEG7: IC1.1 LCD1.9 | length 1673.3
  Top Layer w11.81: LCD1.9 4508.68,3824.78 5569.69,2763.78 IC1.1
SEG8: IC1.48 LCD1.17 | length 1019.4
  Top Layer w11.81: LCD1.17 5136.99,3905.49 5569.69,3472.8 IC1.48
SEG9: IC1.47 LCD1.18 | length 997.2
  Top Layer w11.81: LCD1.18 5215.53,3889.09 5594.69,3509.93 IC1.47
SEG10: IC1.46 LCD1.19 | length 975
  Top Layer w11.81: LCD1.19 5294.06,3879.95 5619.69,3554.33 IC1.46
SEG11: IC1.45 LCD1.20 | length 952.9
  Top Layer w11.81: LCD1.20 5372.6,3857.32 5644.69,3585.24 IC1.45
SEG12: IC1.44 LCD1.21 | length 930.7
  Top Layer w11.81: LCD1.21 5451.14,3839.16 5669.69,3620.61 IC1.44
SEG13: IC1.43 LCD1.22 | length 908.5
  Top Layer w11.81: LCD1.22 5529.68,3816.96 5694.69,3651.96 IC1.43
SEG14: IC1.42 LCD1.23 | length 886.3
  Top Layer w11.81: LCD1.23 5608.22,3794.28 5719.69,3682.82 IC1.42
SEG15: IC1.41 LCD1.24 | length 864.2
  Top Layer w11.81: LCD1.24 5686.75,3783.32 5744.69,3725.39 IC1.41
SEG16: IC1.40 LCD1.25 | length 842
  Top Layer w11.81: LCD1.25 5769.69,3956.24 IC1.40
SEG17: IC1.39 LCD1.26 | length 860.5
  Top Layer w11.81: IC1.39 5794.69,3733.84 5843.83,3782.99 LCD1.26
SEG18: IC1.38 LCD1.27 | length 882.7
  Top Layer w11.81: IC1.38 5819.69,3698.03 5922.37,3800.72 LCD1.27
SEG19: IC1.37 LCD1.28 | length 904.9
  Top Layer w11.81: IC1.37 5844.69,3680.45 6000.91,3836.67 LCD1.28
SEG20: IC1.36 LCD1.29 | length 927
  Top Layer w11.81: IC1.36 5869.69,3649.93 6079.45,3859.69 LCD1.29
SEG21: IC1.35 LCD1.30 | length 949.2
  Top Layer w11.81: IC1.35 5894.69,3606.5 6157.98,3869.8 LCD1.30
SEG22: IC1.34 LCD1.31 | length 971.4
  Top Layer w11.81: IC1.34 5919.69,3551.67 6144.69,3776.67 6236.52,3868.5 LCD1.31
SEG23: IC1.33 LCD1.32 | length 993.6
  Top Layer w11.81: IC1.33 5944.69,3498.13 6223.22,3776.67 6315.06,3868.5 LCD1.32
SEG24: IC1.32 LCD1.33 | length 1015.7
  Top Layer w11.81: IC1.32 5969.69,3444.59 6301.76,3776.67 6393.6,3868.5 LCD1.33
SEG25: IC1.31 LCD1.34 | length 1037.9
  Top Layer w11.81: IC1.31 5994.69,3391.05 6380.3,3776.67 6472.14,3868.5 LCD1.34
SEG26: IC1.30 LCD1.35 | length 1060.1
  Top Layer w11.81: IC1.30 6019.69,3346.46 6550.68,3877.45 LCD1.35
SEG27: IC1.29 LCD1.36 | length 1082.3
  Top Layer w11.81: IC1.29 6044.69,3299.02 6629.21,3883.54 LCD1.36
SEG28: IC1.28 LCD1.37 | length 1104.5
  Top Layer w11.81: IC1.28 6069.69,3249.21 6707.75,3887.28 LCD1.37
SEG29: IC1.27 LCD1.38 | length 1126.6
  Top Layer w11.81: IC1.27 6094.69,3210.43 6786.29,3902.04 LCD1.38
SEG30: IC1.26 LCD1.39 | length 1145.3
  Top Layer w11.81: IC1.26 6119.69,3180.71 6850.99,3912.01 6850.99,3946.79 LCD1.39@6862.38,3958.18
SEG31: IC1.25 LCD1.40 | length 1198.7
  Top Layer w11.81: IC1.25 6144.69,3153.43 6835.98,3844.73 6883.31,3844.73 6943.37,3904.78 LCD1.40
VCC_5V: *1.2 *2.4 *2.5 *2.6 *2.12 *2.13 C1.2 C2.2 C3.1 C4.1 C5.1 C8.1 IC1.17 JP1.2 R1.2 R2.2 R5.1 R6.1 R7.1 R10.1 R14.2 RN1.1 | length 14953.4
  Top Layer w11.81: C5.1 5969.69,2631.29 IC1.17 5969.69,2821.26 5994.69,2846.26 6252.86,2846.26 6303.89,2795.22 6408.64,2795.22 6415.56,2802.14 6415.56,2872.65 R10.1
  Top Layer w15: *2.4 4116.14,3156.69 4119.92,3160.47 C3.1
  Top Layer w20: R1.2 R1.2@2667.45,2003.48 ; *2.6 *2.5 ; C3.1@4119.92,3160.47 4119.92,2944.58 *2.4 *2.5 ; C1.2 4119.92,2482.44 4119.92,2721.42 *2.13 *2.12 *2.5
  Top Layer w39.37: 2890.16,2364.96 2905.77,2364.96 ; 2890.16,2380.57 2905.77,2364.96 ; 3703.15,2374.84 C8.1 ; C1.2 4129.92,2388.02 4106.86,2364.96 2905.77,2364.96 ; R5.1 6416.06,3164.69 6416.06,2969.3 R7.1 6416.35,2968.58 6416.35,2873.44 R10.1 ; RN1.1 6936.22,1263.13 6946.54,1252.82 7026.45,1252.82 7032.28,1246.98 7036.22,1243.04 R14.2
  Top Layer w43.31: 2890.16,2364.96 2728.07,2364.96 2663.73,2300.62 2663.73,1262.83 2769.65,1156.91 JP1.2 2785.87,1011.27 2825.75,971.39 5680.67,971.39 5984.05,1274.77 5984.05,1482.42 ; C5.1 5984.05,2402.27 ; 7036.22,1243.04 7091.13,1297.95 7091.13,1482.42 ; *1.2 7423.62,3278.13 7398.25,3303.5 7219.47,3303.5 7194.1,3278.13 R2.2 7190.16,3184.25 7116.5,3184.25 7091.13,3158.88 7091.13,2402.27 ; 5984.05,1482.42 7091.13,1482.42 ; 5984.05,1482.42 5984.05,2402.27 ; 5984.05,2402.27 7091.13,2402.27 ; 7091.13,1482.42 7091.13,2402.27
WR: IC1.11 J1.2 R6.2 | length 2716.5
  Top Layer w11.81: 4907.95,1595.55 4907.95,1679.23 5819.69,2590.97 IC1.11 5819.69,2897.35 5868.8,2946.46 6094.09,2946.46 6204.39,3056.75 6335.1,3056.75 R6.2
  Top Layer w20: J1.2@4907.95,1148.78 4907.95,1595.55
pads on no net: *2.9 *2.15 IC1.10 IC1.14 IC1.15 IC1.18 VIT1.VIT1 VIT2.VIT1 VIT3.VIT1 VIT4.VIT1 VIT5.VIT1 VIT6.VIT1 VIT7.VIT1 VIT8.VIT1 VIT9.VIT1 VIT10.VIT1 VIT11.VIT1 VIT12.VIT1 VIT13.VIT1 VIT14.VIT1 VIT15.VIT1 VIT16.VIT1 VIT17.VIT1 VIT18.VIT1 VIT19.VIT1

## Polygon pours and split planes (outlines as drawn)
GND on Top Layer "GND" (solid, pour order 2): -6.54,4655.84 1.99,4647.31 1.99,-2.98 10843.5,-2.98 10844.36,-3.84 10844.36,4669.97

## Keep-outs
Keep-Out Layer:
  lines w10: 0.6,1.84 2.31,3.56 10837.15,3.56 10846.03,12.44 10846.03,4657.4 10844.47,4658.96 0.6,4658.96 0.6,1.84

## Other copper
Top Layer:
  region net VCC_5V: 5959.61,2619.01 5963.55,2665.76 5965.41,2667.62 5974.68,2667.62 6005.4,2627.64 5994.69,2616.93
  region net GND: 5880.4,2613.25 5863.36,2651.43 5875.69,2670.08 5889.91,2655.86 5926.2,2621.87 5915.48,2611.16
  pour cut-out: 3161.98,3984.26 3504.69,4326.97 7443.88,4326.97 7680.97,4089.88 7680.97,1404.13 7665.88,1389.04 3161.98,1389.04 3161.98,2030.3 3177.07,2045.39 5063.12,2045.39 5063.12,3026.14 4489.76,3599.5 3161.98,3599.5
  pour cut-out: 1770.29,3662.66 1773.83,3659.13 1773.83,3531.58 1639.21,3531.58 302.7,2195.07 302.69,0.88 310.24,8.43 10442.12,8.43 10442.12,3840.91 10321.42,3961.6 10306.33,3946.51 8948.36,3946.51 8895.56,3999.31 8895.56,4195.48 8596.66,4494.39 8444.86,4494.38 8596.66,4342.59 8596.66,2139.73 8384.89,1927.97 8384.89,845.88 8292.13,753.12 7060.63,753.12 7024.55,789.21 7029.71,794.38 7029.71,1247.8 7081.24,1299.33 7055.47,1325.09 7055.47,1435.33 6052.78,1406.26 5691.4,973.12 2905.92,973.12 2443.71,1435.33 2443.71,3664.48 2428.26,3679.92

## Text inside footprints (layer, text, board x,y; h text height)
LED1: Top Overlay "A" at 2780.99,2007.03 h31.5 r180; Top Overlay "K" at 2966.52,2009.99 h31.5 r180